# Altium PCB AD版本.pcbdoc
Units mil, origin at the board's own origin, x right, y up, seen from the top; angles counter-clockwise.
Board outline 3447.27 x 3991.5 mil, 2 copper layers (Top Layer, Bottom Layer); 16 components, 43 nets, 121 pads, 8 vias.
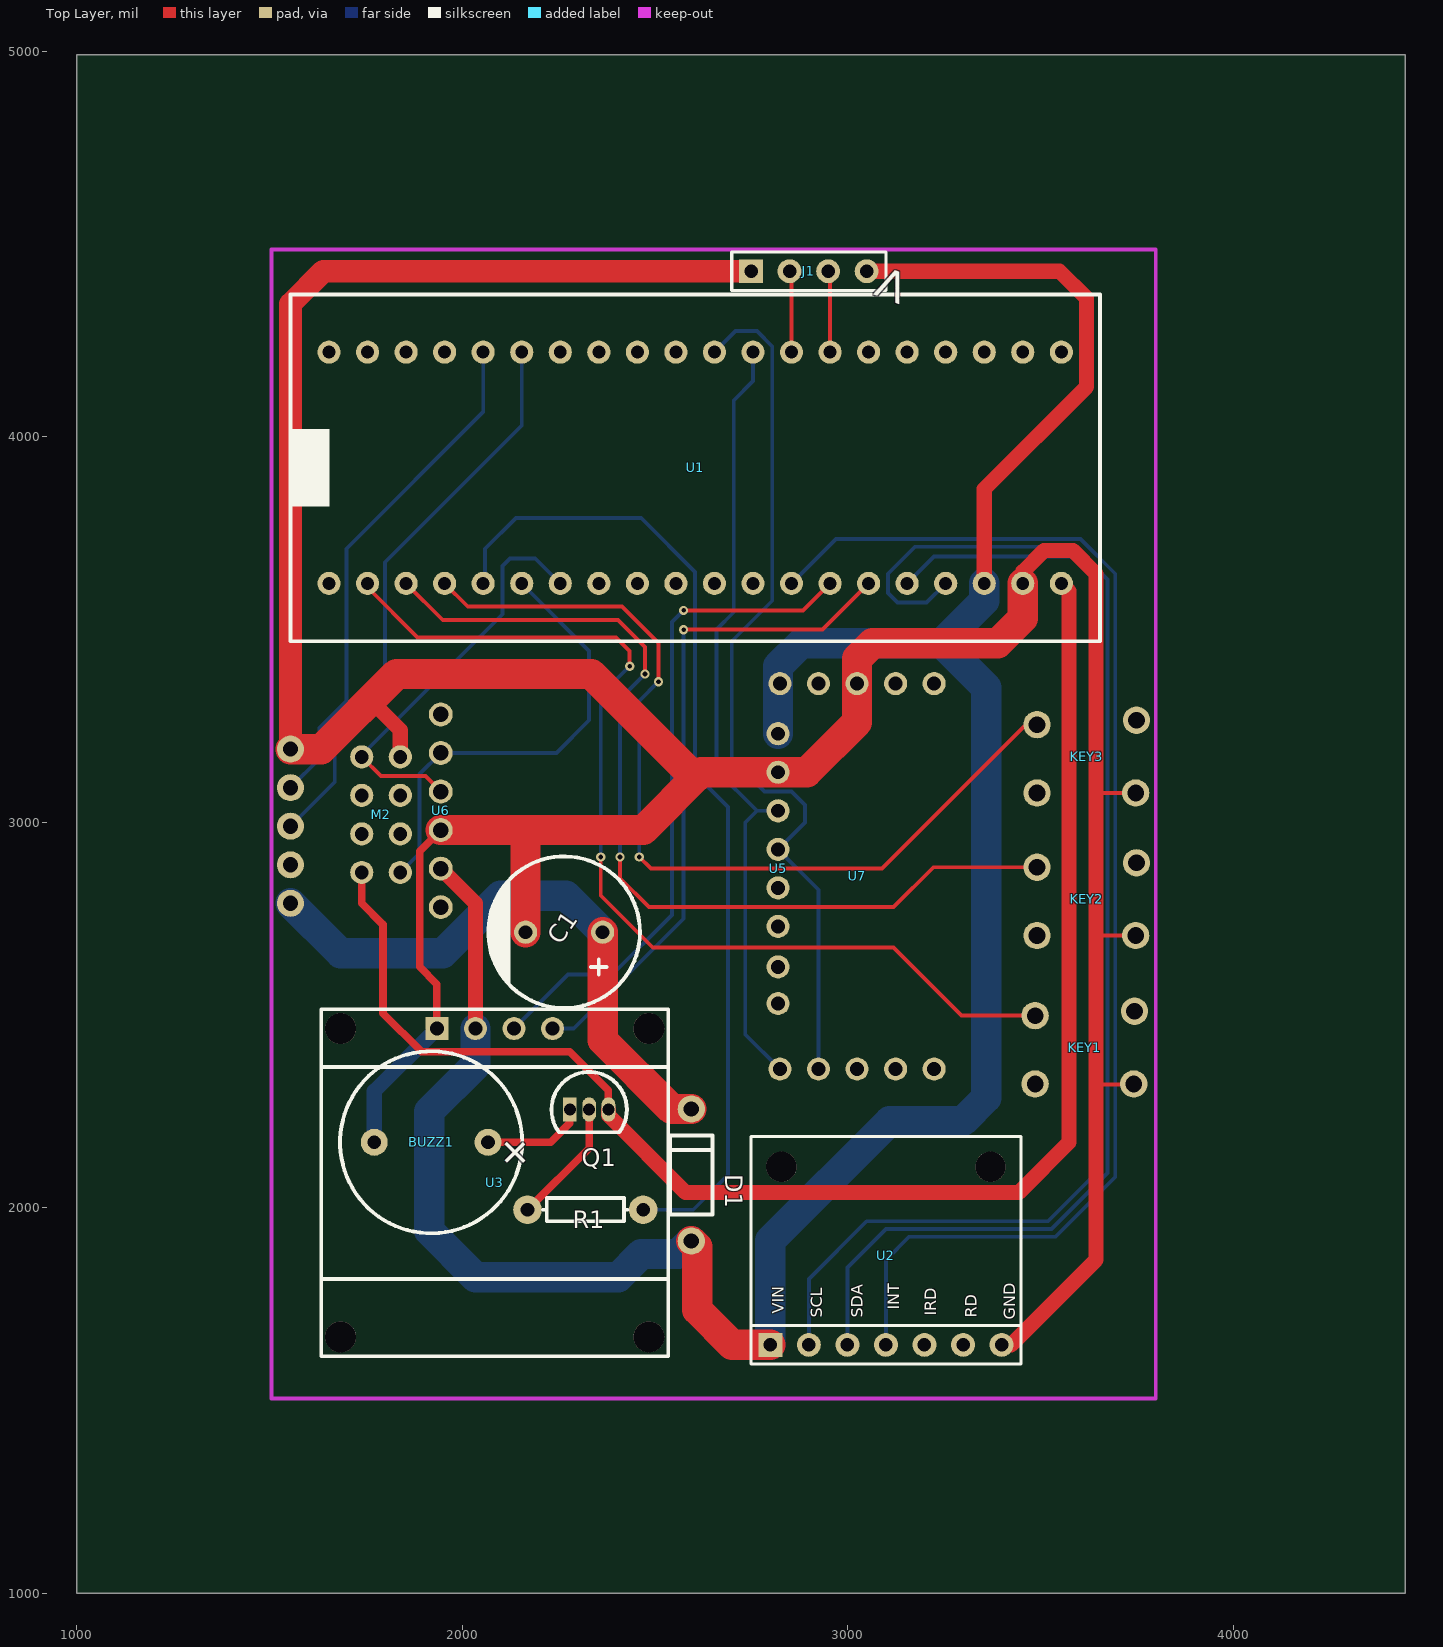
[diagram p0: Top Layer view]
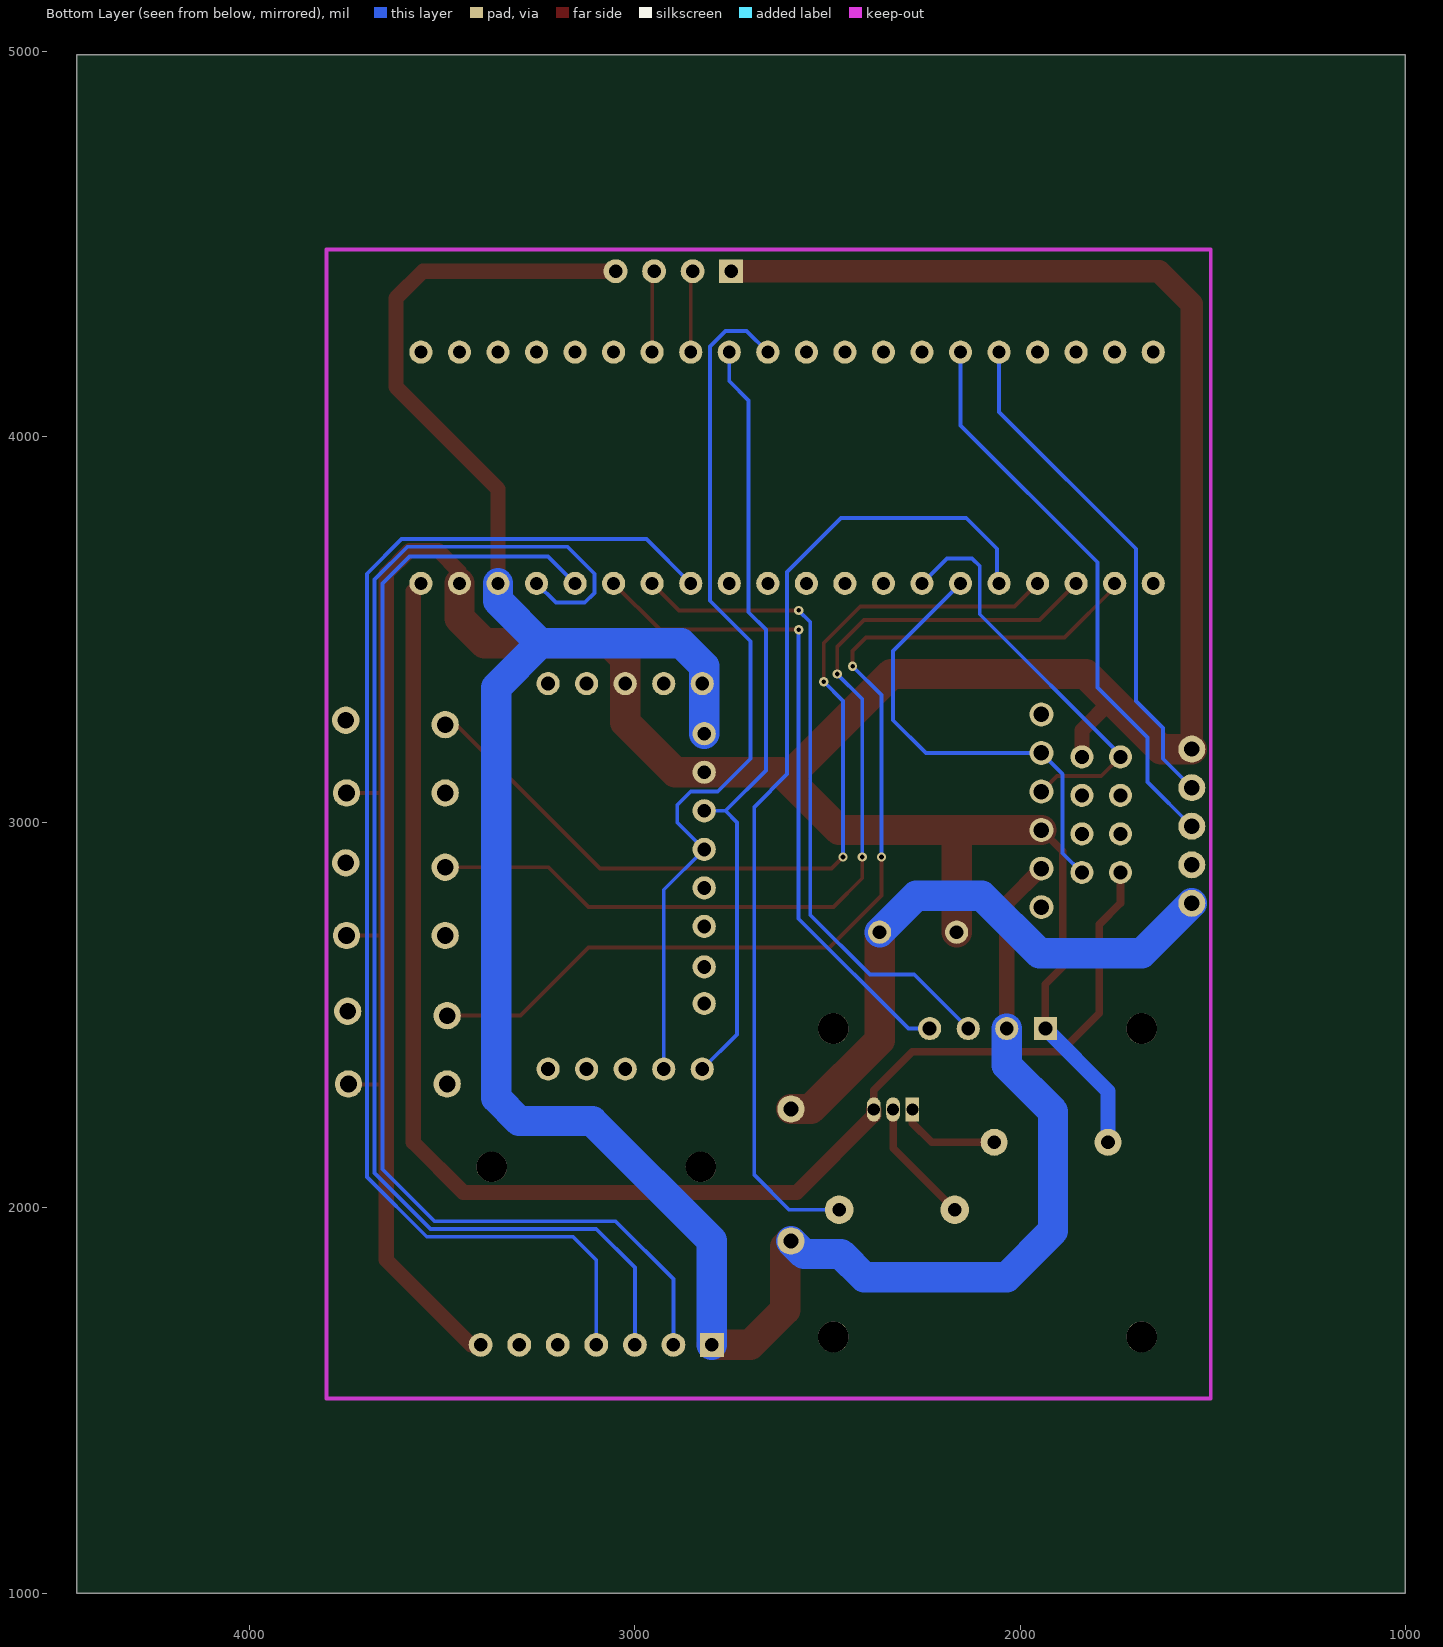
[diagram p1: Bottom Layer view, seen from below]

## Layer stack, top to bottom
Top Layer: signal copper (thickness not stored)
Dielectric: dielectric 12.6, FR-4, Dk 4.8
Bottom Layer: signal copper (thickness not stored)

## Board outline
4447.27,1000 1000,1000 1000,4991.5 4447.27,4991.5

## Components (designator, comment, footprint, x,y, rotation, side; value= is the part's Value field where it differs from the comment)
BUZZ1 "蜂鸣器BD12.0-P7.50" BUZ-TH_BD12.0-P7.50-D0.6-FD 1919.4,2170 r180 top
C1 "1000u" CAP-D10.0×F5.0 2264.4,2715 r180 top
D1 "1N4007" DO-41_BD2.4-L4.7-P8.70-D0.9-RD 2594.4,2085 r270 top
J1 "HDR-M-2.54_1x4" HDR-M-2.54_1X4 2899.4,4430 r0 top
KEY1 "K4-6×6_TH" KEY-TH_4P-L6.0-W6.0-P4.50-LS6.5 3614.4,2410 r180 top
KEY2 "K4-6×6_TH" KEY-TH_4P-L6.0-W6.0-P4.50-LS6.5 3619.4,2795 r180 top
KEY3 "K4-6×6_TH" KEY-TH_4P-L6.0-W6.0-P4.50-LS6.5 3619.4,3165 r180 top
M2 "ESP8266-01S" ESP8266-01S_DIP8 1789.4,3020 r270 top
Q1 "2N3906(TO-92)" TO-92-3_L4.9-W3.7-P1.27-L 2329.4,2255 r0 top
R1 "1k" R_AXIAL-0.3 2319.4,1995 r180 top
U1 "STM32F103最小系统板" STM32F103最小系统板 3654.4,3520 r90 top
U2 "MAX30102模块" MAX30102模块 3449.4,2185 r90 top
U3 "OLED-0.96-4P" OLED-9.6-4P 1634.4,2515 r0 top
U5 "MPU6050" MPU6050模块 2819.4,2880 r0 top
U6 "HC-05（蓝牙模块）" HC-05 1944.4,3030 r90 top
U7 "ADXL345模块" ADXL345模块 3024.4,2860 r90 top

## Footprints (in the part's own frame and the unit in brackets; to place one, negate y for a bottom-side part, rotate by r counter-clockwise, add the part's x,y. Pads: shape width x height; smd on the part's side, far side on the other; paste and mask are expansions set on the pad)
ADXL345模块 [mil]
  round 60 hole 36: 1(-500,200) 2(-500,100) 3(-500,0) 4(-500,-100) 5(-500,-200) 6(500,-200) 7(500,-100) 8(500,0) 9(500,100) 10(500,200)
BUZ-TH_BD12.0-P7.50-D0.6-FD [mil]
  round 70 hole 35.43: 1(-147.64,0) 2(147.64,0)
  silkscreen extent -236,-236 236,236
CAP-D10.0×F5.0 [mil]
  round 60 hole 36: 1(-100,0) 2(100,0)
  silkscreen extent -197,-197 200,197
DO-41_BD2.4-L4.7-P8.70-D0.9-RD [mm]
  round 1.8 hole 1: 1(-4.35,0) 2(4.35,0)
  silkscreen extent -2.6,-1.4 2.6,1.4
ESP8266-01S_DIP8 [mil]
  round 60 hole 36: 1(-150,50) 2(-50,50) 3(50,50) 4(150,50) 5(-150,-50) 6(-50,-50) 7(50,-50) 8(150,-50)
HC-05 [mil]
  round 62 hole 40.16: 1(-250,0) 2(-150,0) 3(-50,0) 4(50,0) 5(150,0) 6(250,0)
HDR-M-2.54_1X4 [mil]
  rect 62x62 hole 35: 1(-150,0)
  round 62 hole 35: 2(-50,0) 3(50,0) 4(150,0)
  silkscreen extent -200,-50 200,50
KEY-TH_4P-L6.0-W6.0-P4.50-LS6.5 [mm]
  round 1.8 hole 1.1: 1(-3.302,-2.54) 2(3.251,-2.25) 3(3.251,2.25) 4(-3.251,2.25)
MAX30102模块 [mil]
  rect 62x62 hole 35: 1(-540.55,650)
  round 62 hole 35: 2(-540.55,550) 3(-540.55,450) 4(-540.55,350) 5(-540.55,250) 6(-540.55,150) 7(-540.55,50)
  round 78.74 hole 78.74 unplated: ""(-78.74,621.26) ""(-78.74,78.74)
  silkscreen extent -591,0 0,700
MPU6050模块 [mil]
  round 60 hole 36: 1(0,350) 2(0,250) 3(0,150) 4(0,50) 5(0,-50) 6(0,-150) 7(0,-255) 8(0,-350)
OLED-9.6-4P [mil]
  rect 60x60 hole 36: 1(300,-50)
  round 60 hole 36: 2(400,-50) 3(500,-50) 4(600,-50)
  round 80 hole 80 unplated: ""(50,-850) ""(50,-50) ""(850,-850) ""(850,-50)
  silkscreen extent 0,-900 900,0
R_AXIAL-0.3 [mil]
  round 74 hole 35.4: 1(-150,0) 2(150,0)
  silkscreen extent -110,-30 110,30
STM32F103最小系统板 [mil]
  round 60 hole 33.46: 1(100,2000) 2(100,1900) 3(100,1800) 4(100,1700) 5(100,1600) 6(100,1500) 7(100,1400) 8(100,1300) 9(100,1200) 10(100,1100) 11(100,1000) 12(100,900) 13(100,800) 14(100,700) 15(100,600) 16(100,500) 17(100,400) 18(100,300) 19(100,200) 20(100,100) 21(700,100) 22(700,200) 23(700,300) 24(700,400) 25(700,500) 26(700,600) 27(700,700) 28(700,800) 29(700,900) 30(700,1000) 31(700,1100) 32(700,1200) 33(700,1300) 34(700,1400) 35(700,1500) 36(700,1600) 37(700,1700) 38(700,1800) 39(700,1900) 40(700,2000)
  silkscreen extent -50,0 850,2100
TO-92-3_L4.9-W3.7-P1.27-L [mm]
  rect 0.9x1.6 hole 0.8: 1(-1.27,0)
  oval 0.9x1.6 hole 0.8: 2(0,0) 3(1.27,0)
  silkscreen extent -2.48,-1.5 2.48,2.48

## Free pads (board coordinates)
  round 70.08 hole 39.37: 2(1554.4,2790) 3(1554.4,2890) 4(1554.4,2990) 5(1554.4,3090) 6(1554.4,3190)

## Via types
v1: diameter 24, hole 12, Top Layer to Bottom Layer, tented both sides, 8 vias

## Nets (pads, with @x,y where several pads share a name; then routed paths per layer and width w, separated by ;. In a path a pad name is that pad's centre, name@x,y a point inside that pad or via, vN(x,y) a via of type N, cw(c..) or ccw(c..) an arc to the next point about the centre after c; other vN are vias at no path point)
3.3V: M2.8 Q1.3 U1.20 | length 3910.6
  Top Layer w19.68: M2.8 1739.4,2790 1794.4,2735 1794.4,2505 1894.4,2405 2279.4,2405 2379.4,2305 Q1.3
  Top Layer w39.37: Q1.3 2379.4,2240 2579.4,2040 3444.4,2040 3574.4,2170 3574.4,3600 U1.20
+5V: D1.2 J1.4 U1.18 U2.1 U3.2 U5.1 U6.2 U7.10 | length 6693.6
  Top Layer w39.37: U6.2 2034.4,2790 U3.2 ; J1.4 3549.4,4430 3619.4,4360 3619.4,4130 3354.4,3865 U1.18
  Top Layer w78.74: D1.2 2609.4,1898.74 2609.4,1735 2699.95,1644.45 U2.1
  Bottom Layer w78.74: U3.2 2034.4,2370 1914.4,2250 1914.4,1940 2034.4,1820 2404.4,1820 2464.4,1880 2560.66,1880 D1.2 ; U2.1 2799.4,1915 3109.4,2225 3299.4,2225 3359.4,2285 3359.4,3350 3244.4,3465 ; U5.1 2819.4,3405 2879.4,3465 3244.4,3465 ; U1.18 3354.4,3575 3244.4,3465
A0: U1.25
A1: U1.26
A2: J1.3 U1.27 | length 212.1
  Top Layer w10: J1.3 2954.4,4425 U1.27
A3: J1.2 U1.28 | length 212.1
  Top Layer w10: J1.2 2854.4,4425 U1.28
A4: U1.29 U5.3 U7.1 | length 2102.5
  Bottom Layer w10: U1.29 2754.4,4145 2704.4,4095 2704.4,3545 2659.4,3500 2659.4,3135 2764.4,3030 ; U7.1 2734.4,2450 2734.4,3000 2764.4,3030 ; 2764.4,3030 U5.3 2764.4,3030
A5: U1.30 U5.4 U7.2 | length 2300
  Bottom Layer w10: U1.30 2709.4,4275 2764.4,4275 2804.4,4235 2804.4,3575 2699.4,3470 2699.4,3165 2784.4,3080 2854.4,3080 2889.4,3045 2889.4,3000 U5.4 2924.4,2825 U7.2
A6: U1.31
A7: U1.32
A8: R1.1 U1.5 | length 2585.7
  Bottom Layer w10: U1.5 2059.4,3625 2059.4,3710 2139.4,3790 2464.4,3790 2604.4,3650 2604.4,3125 2689.4,3040 2689.4,2085 2599.4,1995 R1.1
A9: M2.4 U1.6 U6.5 | length 1201.2
  Bottom Layer w10: M2.4 1889.4,2920 1889.4,3125 U6.5 2244.4,3180 2329.4,3265 2329.4,3445 U1.6
A10: M2.5 U1.7 U6.4 | length 1073.7
  Top Layer w10: M2.5 1789.4,3120 1904.4,3120 U6.4
  Bottom Layer w10: M2.5 1739.4,3175 2104.4,3540 2104.4,3665 2124.4,3685 2189.4,3685 U1.7
A11: U1.8
A12: U1.9
A15: U1.10
B0: U1.33
B1: U1.34
B3: U1.11
B4: U1.12
B5: U1.13 U2.4 | length 3394.5
  Bottom Layer w10: U1.13 2969.4,3735 3604.4,3735 3694.4,3645 3694.4,2080 3539.4,1925 3159.4,1925 3099.4,1865 U2.4
B6: U1.14 U3.3 | length 1743.6
  Top Layer w10: v1(2574.4,3550) 2884.4,3550 U1.14
  Bottom Layer w10: U3.3 2274.4,2605 2389.4,2605 2544.4,2760 2544.4,3520 v1(2574.4,3550)
B7: U1.15 U3.4 | length 1737.8
  Top Layer w10: v1(2574.4,3500) 2934.4,3500 U1.15
  Bottom Layer w10: U3.4 2289.4,2465 2574.4,2750 v1(2574.4,3500)
B8: U1.16 U2.2 | length 3121.6
  Bottom Layer w10: U2.2 2899.4,1815 3049.4,1965 3519.4,1965 3654.4,2100 3654.4,3620 3584.4,3690 3224.4,3690 U1.16
B9: U1.17 U2.3 | length 3382.3
  Bottom Layer w10: U2.3 2999.4,1845 3099.4,1945 3529.4,1945 3674.4,2090 3674.4,3630 3589.4,3715 3174.4,3715 3104.4,3645 3104.4,3595 3129.4,3570 3204.4,3570 U1.17
B10: pad.4 U1.35 | length 1478.5
  Bottom Layer w10: pad.4 1669.4,3105 1669.4,3220 1799.4,3350 1799.4,3675 2154.4,4030 U1.35
B11: pad.5 U1.36 | length 1337.1
  Bottom Layer w10: pad.5 1629.4,3165 1629.4,3245 1699.4,3315 1699.4,3710 2054.4,4065 U1.36
B12: U1.1
B13: KEY1.2 U1.2 | length 2680.4
  Top Layer w10: U1.2 1754.4,3610 1884.4,3480 2399.4,3480 2434.4,3445 v1(2434.4,3405) ; v1(2359.4,2910) 2359.4,2810 2494.4,2675 3119.4,2675 3295.8,2498.6 KEY1.2
  Bottom Layer w10: v1(2359.4,2910) 2359.4,3330 v1(2434.4,3405)
B14: KEY2.2 U1.3 | length 2471.2
  Top Layer w10: U1.3 1949.4,3525 2404.4,3525 2474.4,3455 v1(2474.4,3385) ; v1(2409.4,2910) 2409.4,2855 2484.4,2780 3119.4,2780 3223,2883.6 KEY2.2
  Bottom Layer w10: v1(2409.4,2910) 2409.4,3320 v1(2474.4,3385)
B15: KEY3.2 U1.4 | length 2394.1
  Top Layer w10: U1.4 2014.4,3560 2414.4,3560 2509.4,3465 v1(2509.4,3365) ; v1(2459.4,2910) 2489.4,2880 3089.4,2880 3463,3253.6 KEY3.2
  Bottom Layer w10: v1(2459.4,2910) 2459.4,3315 v1(2509.4,3365)
BUZZ1_1: BUZZ1.1 Q1.1 | length 268.1
  Top Layer w19.68: BUZZ1.1 2229.4,2170 2279.4,2220 Q1.1
C14: U1.23
C15: U1.24
D1_1: C1.1 D1.1 pad.2 | length 1549.4
  Top Layer w78.74: C1.1 2364.4,2435 2543.1,2256.3 D1.1
  Bottom Layer w78.74: pad.2 1684.4,2660 1949.4,2660 2099.4,2810 2269.4,2810 C1.1
GND: BUZZ1.2 C1.2 J1.1 KEY1.4 KEY2.4 KEY3.4 M2.1 pad.6 U1.19 U2.7 U3.1 U5.2 U6.3 U7.8 | length 9818.7
  Top Layer w10: 3644.4,2320.27 3741.27,2320.27 KEY1.4 ; 3644.4,2705.8 3645,2706.4 KEY2.4 ; 3644.4,3077.4 3645.4,3076.4 KEY3.4
  Top Layer w19.68: U3.1 1934.4,2580 1889.4,2625 1889.4,2925 U6.3
  Top Layer w39.37: 1761.44,3317.04 1839.4,3239.08 M2.1 ; U2.7 3423.85,1644.45 3644.4,1865 3644.4,3645 3584.4,3705 3509.4,3705 3454.4,3650 U1.19
  Top Layer w59.05: pad.6 1554.4,4345 1639.4,4430 J1.1
  Top Layer w78.74: pad.6 1634.4,3190 1829.4,3385 2334.4,3385 2604.4,3115 ; C1.2 2164.4,2970 2154.4,2980 U6.3 2469.4,2980 2619.4,3130 U5.2 2894.4,3130 3024.4,3260 U7.8 3024.4,3425 3064.4,3465 3389.4,3465 3454.4,3530 U1.19
  Bottom Layer w39.37: BUZZ1.2 1771.76,2302.36 U3.1
KEY1_1: KEY1.1
KEY1_3: KEY1.3
KEY2_1: KEY2.1
KEY2_3: KEY2.3
KEY3_1: KEY3.1
KEY3_3: KEY3.3
R1_2: Q1.2 R1.2 | length 326.3
  Top Layer w19.68: R1.2 2329.4,2155 Q1.2
pads on no net: M2.2 M2.3 M2.6 M2.7 U1.21 U1.22 U1.37 U1.38 U1.39 U1.40 U2. U2.5 U2.6 U3. U5.5 U5.6 U5.7 U5.8 U6.1 U6.6 U7.3 U7.4 U7.5 U7.6 U7.7 U7.9

## Silkscreen, mask and mechanical layers (free items; w line width, h text height)
Top Overlay:
  text "V" at 3163.73,4417.34 h80 r159

## Text inside footprints (layer, text, board x,y; h text height)
BUZZ1: Top Overlay "+" at 2129.24,2087.16 h78.74 r45
U2: Top Overlay "VIN" at 2834.4,1725 h30 r90; Top Overlay "GND" at 3434.4,1710 h30 r90; Top Overlay "SCL" at 2934.4,1715 h30 r90; Top Overlay "SDA" at 3039.4,1715 h30 r90; Top Overlay "IRD" at 3229.4,1720 h30 r90; Top Overlay "RD" at 3334.4,1715 h30 r90; Top Overlay "INT" at 3134.4,1735 h30 r90